# Altium PCB 868MHz-PCB.pcbdoc
Units mm, origin at the board's own origin, x right, y up, seen from the top; angles counter-clockwise.
Board outline 84.52 x 94.37 mm, 2 copper layers (Top Layer, Bottom Layer); 8 components, 2 nets, 1 pads, 0 vias.
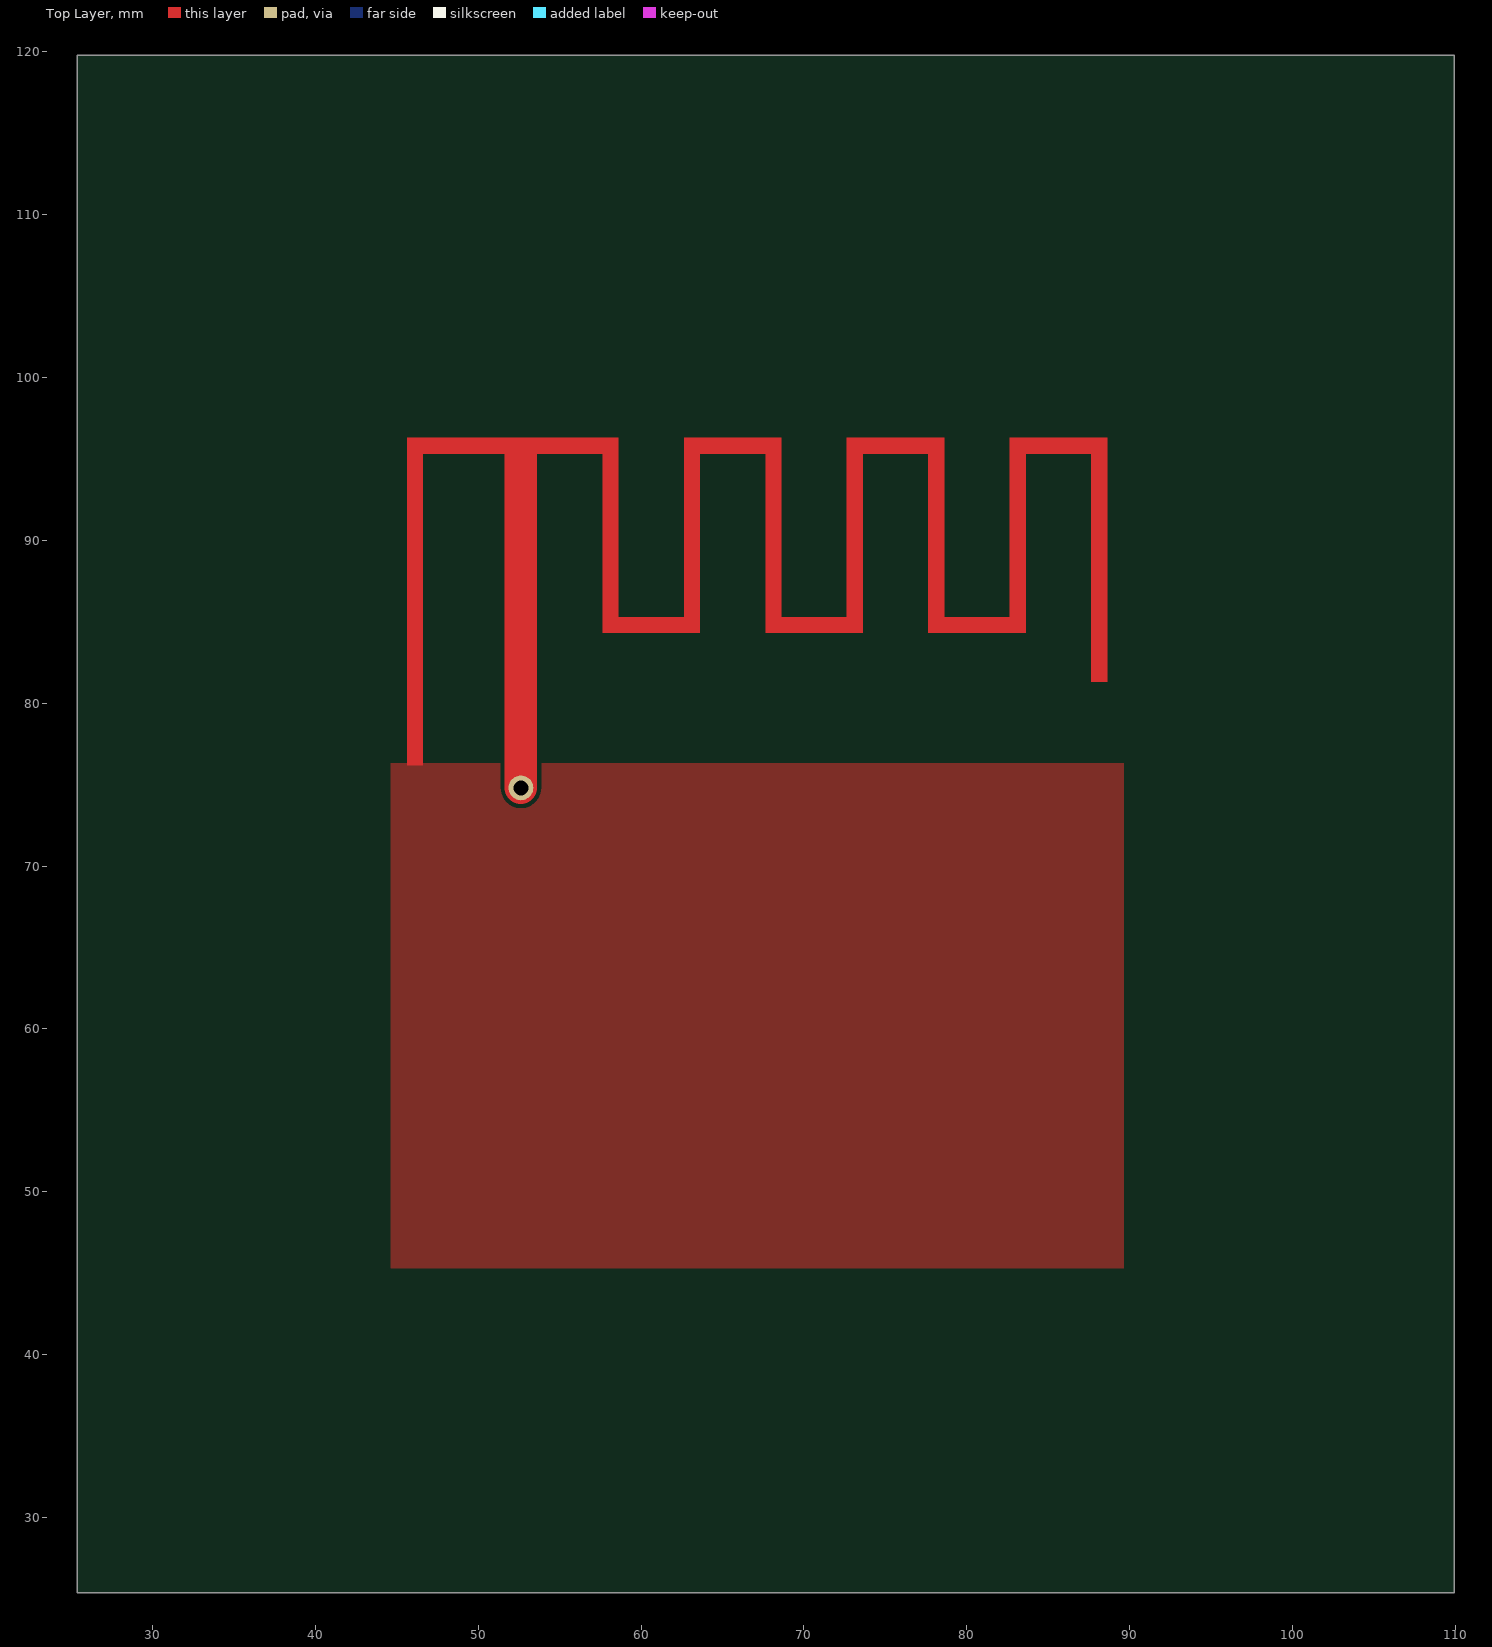
[diagram p0: Top Layer view]
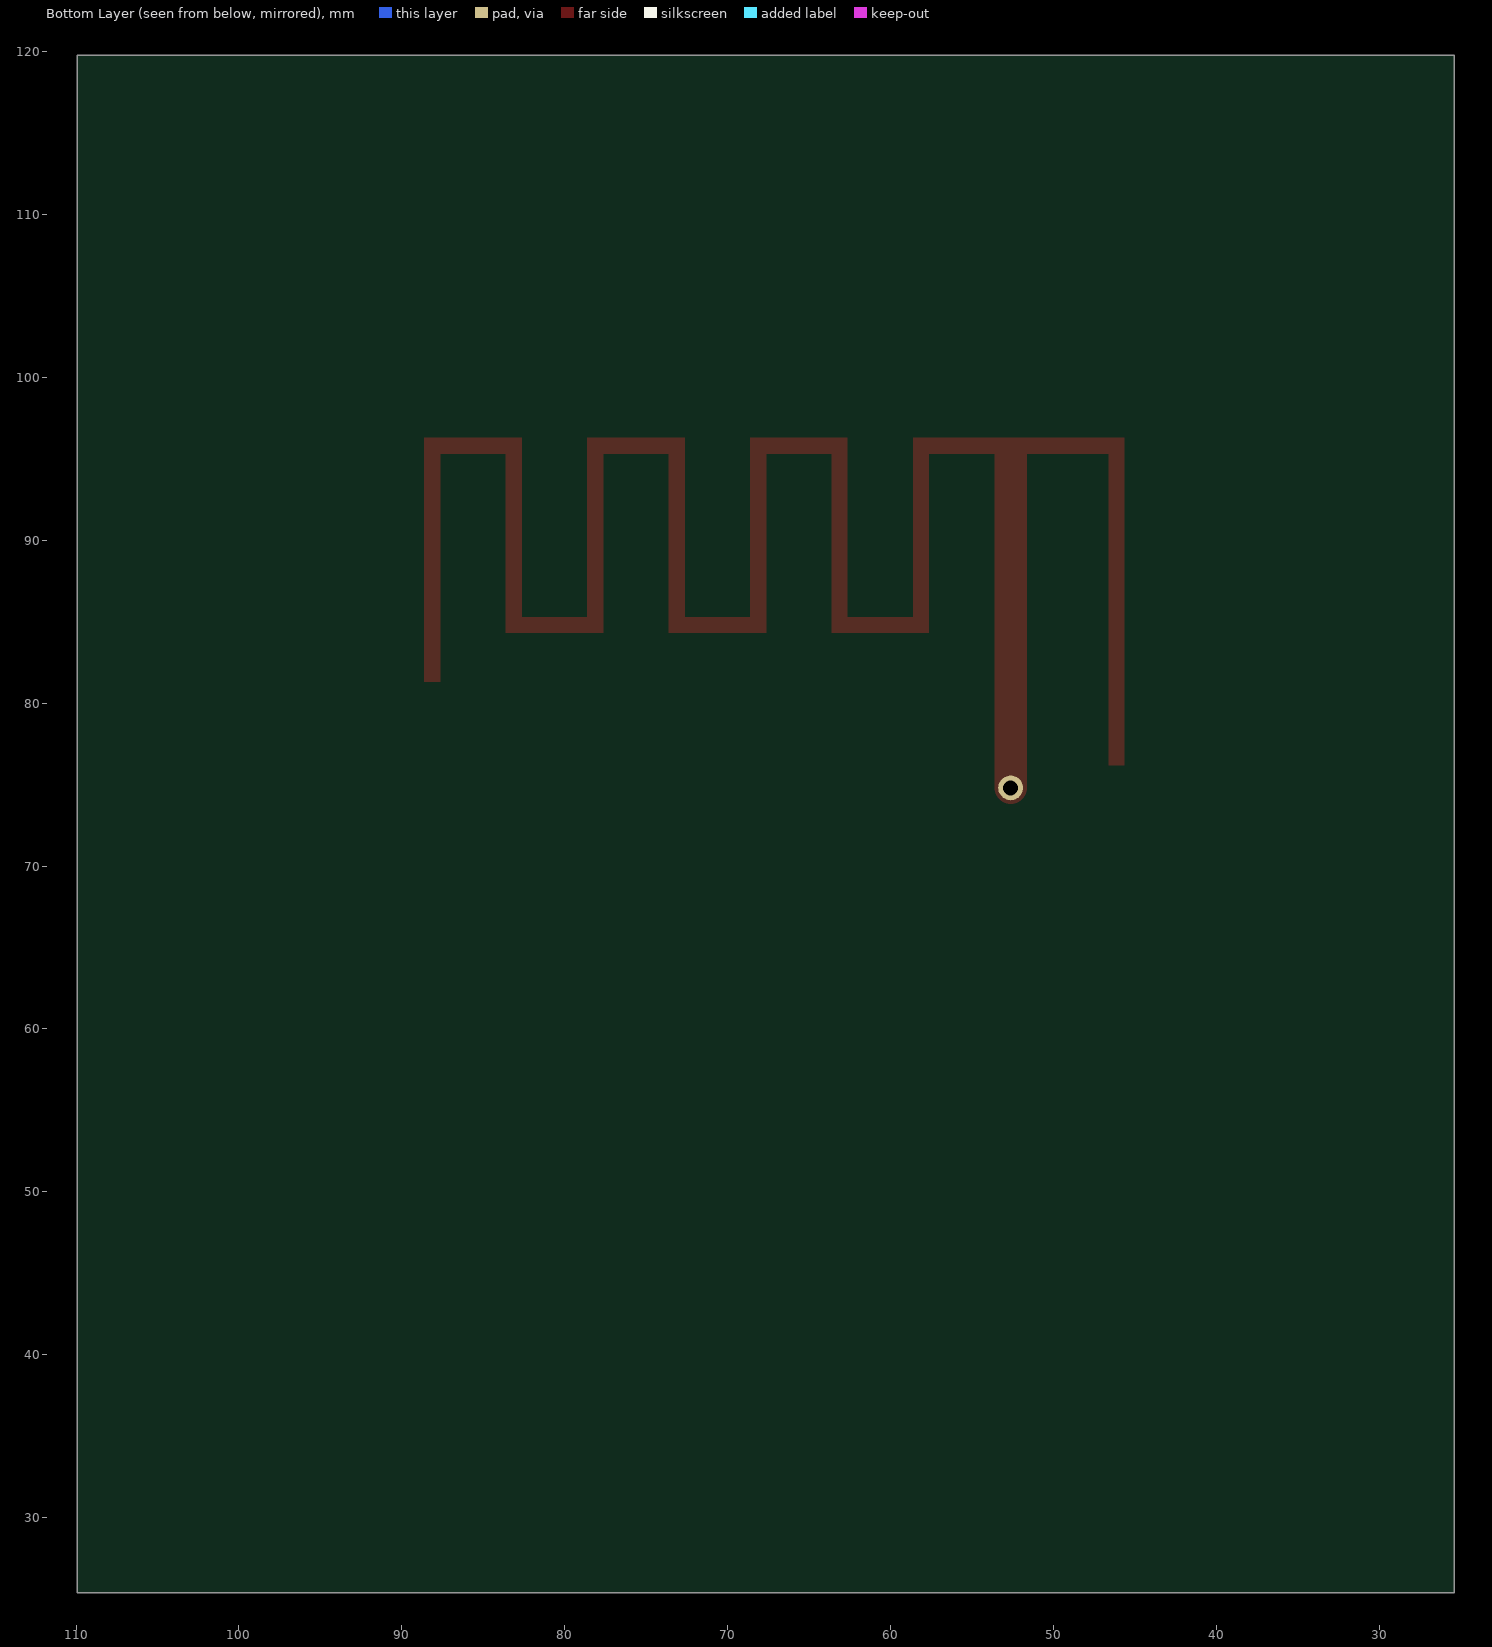
[diagram p1: Bottom Layer view, seen from below]

## Layer stack, top to bottom
Top Solder: solder mask 0.0102, Solder Resist, Dk 3.5
Top Layer: signal copper 0.0356
Dielectric1: dielectric 0.32, FR-4, Dk 4.8
Bottom Layer: signal copper 0.0356
Bottom Solder: solder mask 0.0102, Solder Resist, Dk 3.5

## Board outline
109.919,25.4 25.4,25.4 25.4,119.767 109.919,119.767

## Design rules (kind name [scope] priority, off if disabled: settings)
Clearance [All] p1: gap=0.254 ignorepadtopadclearanceinfootprint=FALSE except(0: Arc-Hole Track-Hole SMDPad-Hole THPad-Hole Via-Hole Fill-Hole Poly-Hole Region-Hole Text-Hole)
PolygonConnect [All] p1: connectstyle=Relief reliefconductorwidth=0.254 reliefentries=4 polygonreliefangle="90 Angle" airgapwidth=0.254
RoutingVias [All] p1: holewidth=0.711 width=1.27 viastyle="Through Hole" minholewidth=0.711 minwidth=1.27 maxholewidth=0.711 maxwidth=1.27
SolderMaskExpansion [All] p1: expansion=0.102 istentingtop=FALSE
Width [All] p1: maxlimit=0.254 minlimit=0.254 preferedwidth=0.254
30 further rules are at their usual default settings.

## Components (designator, comment, footprint, x,y, rotation, side; value= is the part's Value field where it differs from the comment)
? "" ? 40.889,86.301 r0 top
? "" ? 49.128,101.913 r0 top
? "" ? 55.628,97.301 r0 top
? "" ? 80.628,100.639 r0 top
? "" ? 92.465,88.802 r0 top
? "" ? 59.799,90.302 r0 top
? "" ? 94.425,60.801 r0 top
? "" ? 67.378,41.226 r0 top

## Footprints (in the part's own frame and the unit in brackets; to place one, negate y for a bottom-side part, rotate by r counter-clockwise, add the part's x,y. Pads: shape width x height; smd on the part's side, far side on the other; paste and mask are expansions set on the pad)
? [mm]

## Free pads (board coordinates)
  round 1.524 hole 0.914 paste+0 mask+0.051: 1(52.628,74.801)

## Nets (pads, with @x,y where several pads share a name; then routed paths per layer and width w, separated by ;. In a path a pad name is that pad's centre, name@x,y a point inside that pad or via, vN(x,y) a via of type N, cw(c..) or ccw(c..) an arc to the next point about the centre after c; other vN are vias at no path point)
ANT: pad.1 | length 2
  Top Layer w2: pad.1 52.628,76.801
GND: 

## Polygon pours and split planes (outlines as drawn)
GND on Top Layer "Top Layer-GND" (solid, pour order 0): 45.128,76.301 89.628,76.301 89.628,45.302 44.628,45.302 44.628,76.301

## Other copper
Top Layer:
  rectangle net ANT: 51.628,76.301 53.628,96.301
  rectangle net ANT: 52.475,95.301 58.628,96.301
  rectangle net ANT: 57.628,84.325 58.628,96.3
  rectangle net ANT: 57.628,84.301 63.628,85.301
  rectangle net ANT: 62.628,84.325 63.628,96.301
  rectangle net ANT: 62.65,95.301 68.628,96.301
  rectangle net ANT: 67.628,84.325 68.628,96.275
  rectangle net ANT: 67.628,84.301 73.628,85.301
  rectangle net ANT: 72.628,84.325 73.628,96.301
  rectangle net ANT: 72.65,95.301 78.628,96.301
  rectangle net ANT: 77.628,84.325 78.628,96.3
  rectangle net ANT: 77.628,84.301 83.628,85.301
  rectangle net ANT: 82.628,84.325 83.628,96.301
  rectangle net ANT: 82.65,95.301 88.628,96.301
  rectangle net ANT: 87.628,81.301 88.628,96.3
  rectangle net GND: 45.628,95.301 52.55,96.301
  rectangle net GND: 45.628,76.175 46.628,96.275